# Altium PCB пульт.PcbDoc
Units mm, origin at the board's own origin, x right, y up, seen from the top; angles counter-clockwise.
Board outline 62 x 76 mm, 2 copper layers (Top Layer, Bottom Layer); 32 components, 66 nets, 214 pads, 33 vias.
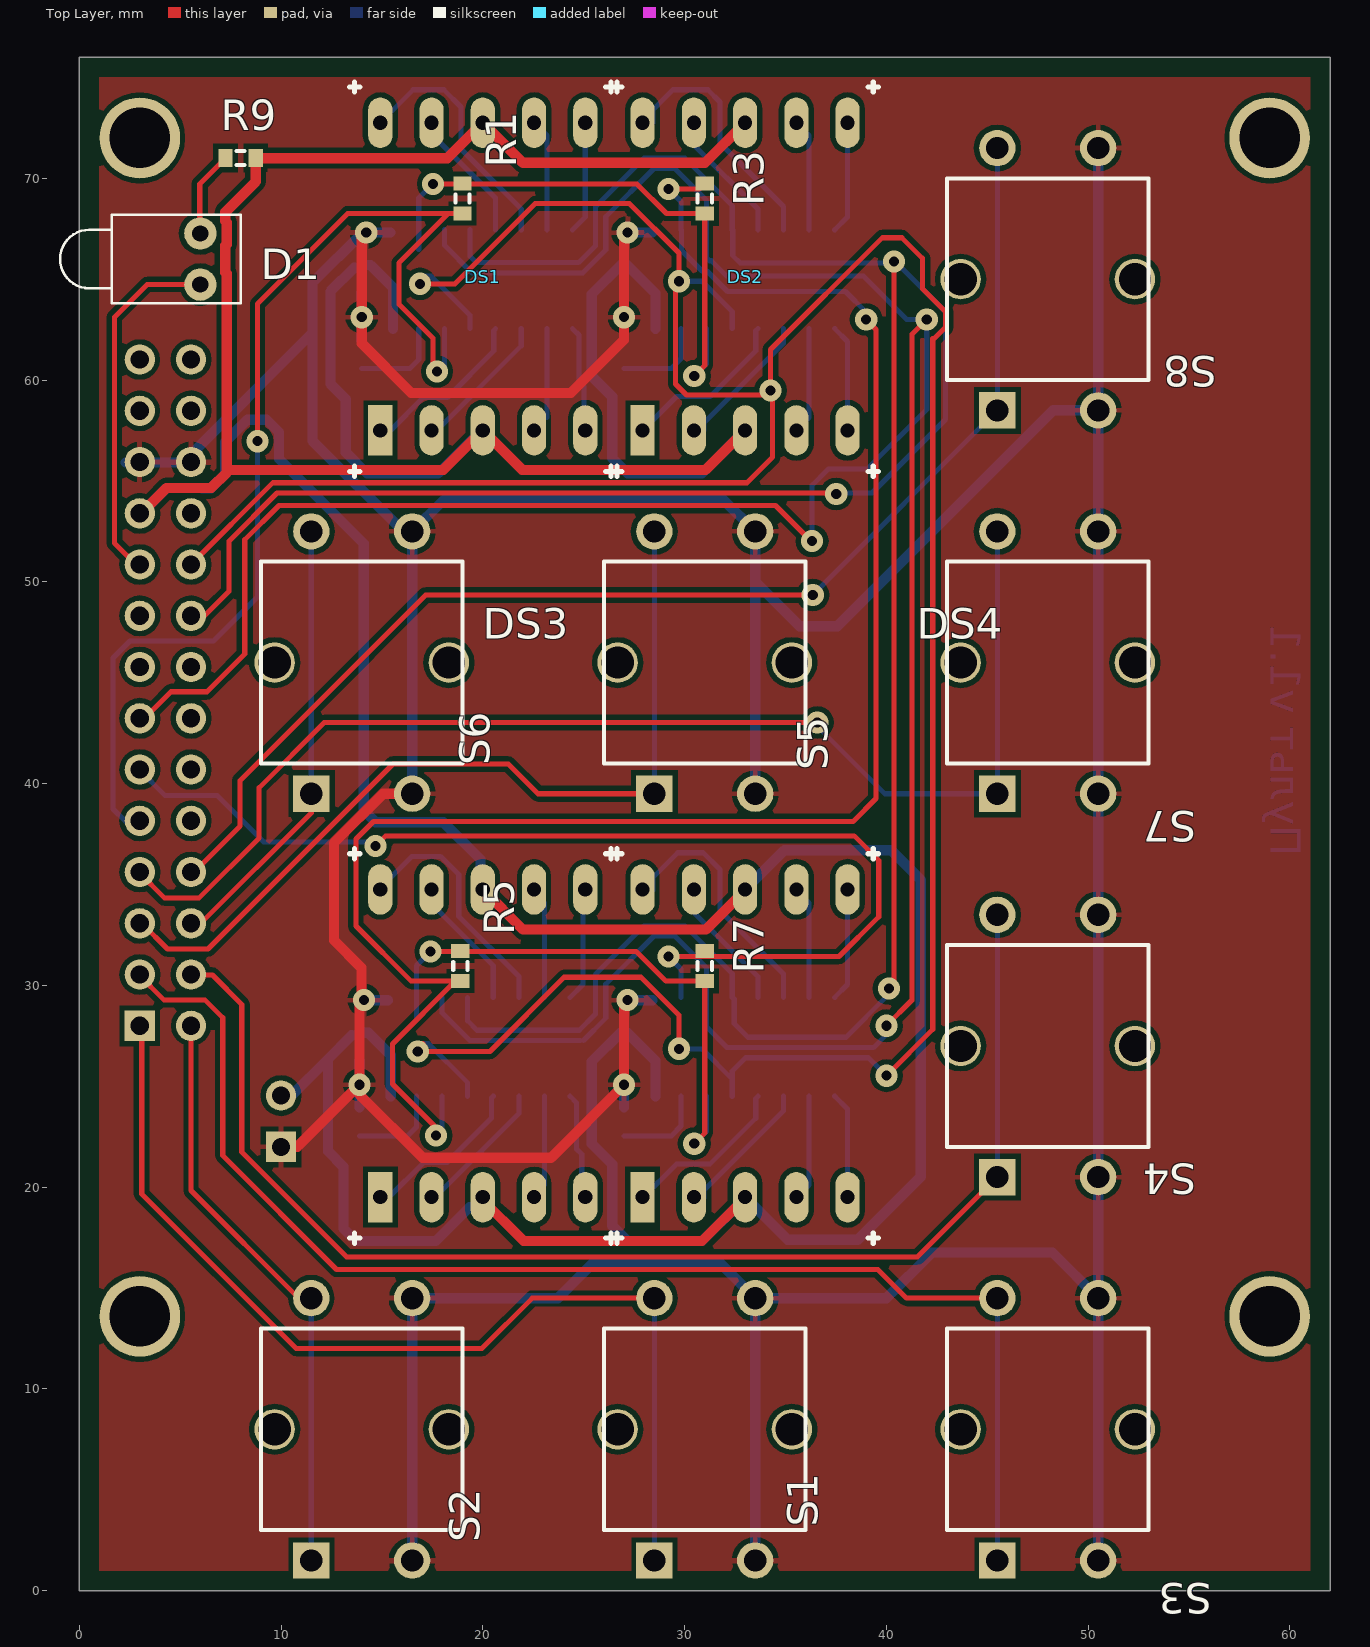
[diagram p0: Top Layer view]
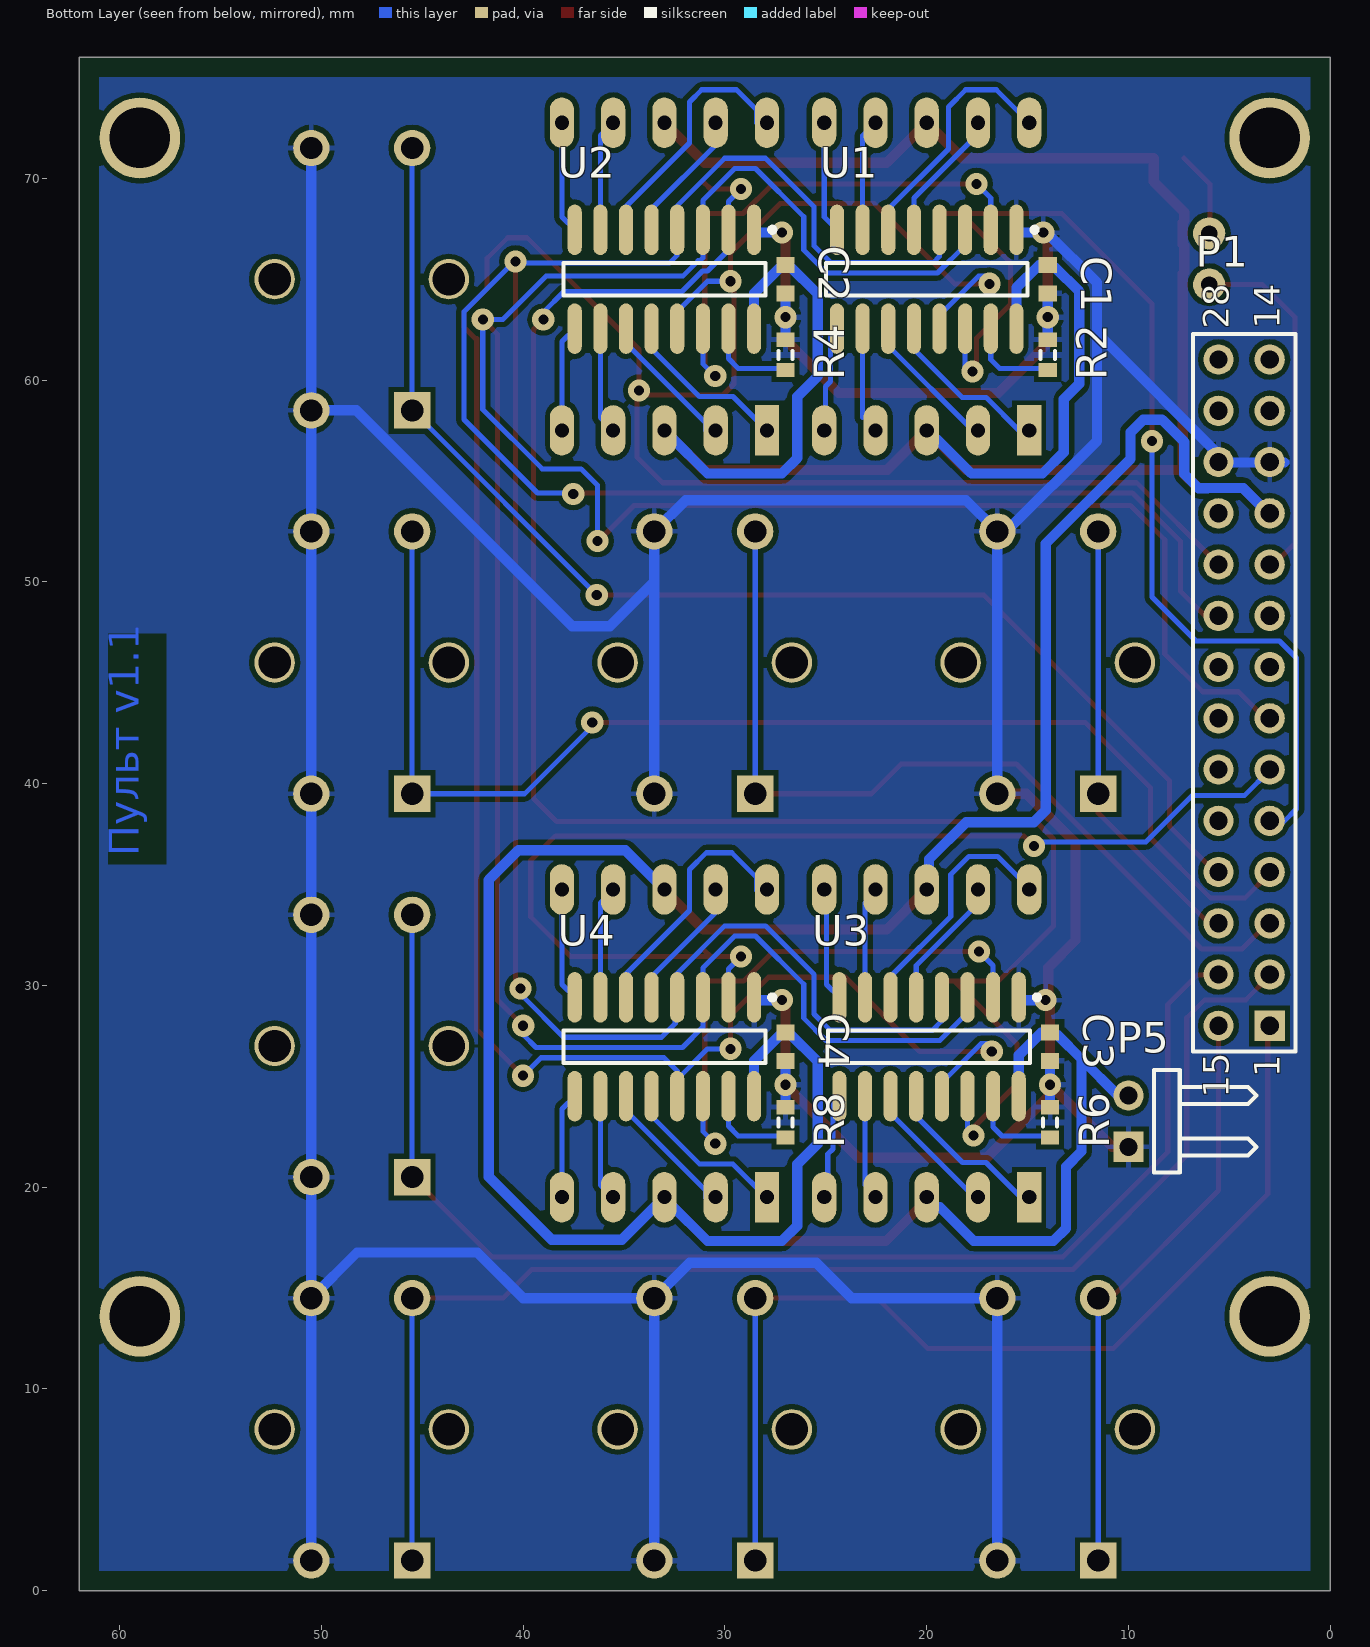
[diagram p1: Bottom Layer view, seen from below]

## Layer stack, top to bottom
Top Layer: signal copper 0.0356
Dielectric: dielectric 0.32, FR-4, Dk 4.8
Bottom Layer: signal copper 0.0356

## Board outline
0,0 62,0 62,76 0,76

## Design rules (kind name [scope] priority, off if disabled: settings)
Clearance [All] p1: gap=0.254
ComponentClearance [All] p1 off: gap=0.254 collisioncheckmode=3 verticalgap=0.254 showdistances=FALSE
PolygonConnect [All] p1: connectstyle=Relief reliefconductorwidth=0.254 reliefentries=4 polygonreliefangle="90 Angle"
RoomDefinition пульт [InComponentClass('пульт')] p1: confinementstyle=ConfineIn formatcopy=TRUE lockcomponents=FALSE outline -3.404,0 61.991,0 61.991,75.997 -3.404,75.997
RoomDefinition "U_Индикатор с драйвером4" [InComponentClass('U_Индикатор с драйвером4')] p2: confinementstyle=ConfineIn formatcopy=TRUE lockcomponents=FALSE outline 23.815,16 40.96,16 40.96,37.96 23.815,37.96
RoomDefinition "U_Индикатор с драйвером3" [InComponentClass('U_Индикатор с драйвером3')] p3: confinementstyle=ConfineIn formatcopy=TRUE lockcomponents=FALSE outline 11,16 27.885,16 27.885,37.96 11,37.96
RoomDefinition "U_Индикатор с драйвером2" [InComponentClass('U_Индикатор с драйвером2')] p4: confinementstyle=ConfineIn formatcopy=TRUE lockcomponents=FALSE outline 23.815,54.04 40.96,54.04 40.96,76 23.815,76
RoomDefinition "U_Индикатор с драйвером1" [InComponentClass('U_Индикатор с драйвером1')] p5: confinementstyle=ConfineIn formatcopy=TRUE lockcomponents=FALSE outline 11.115,54.04 28,54.04 28,76 11.115,76
RoutingVias [All] p1: holewidth=0.5 width=1.1 viastyle="Through Hole" minholewidth=0.5 minwidth=1.1 maxholewidth=0.5 maxwidth=1.1
SilkscreenOverComponentPads [All] p1: minsilkscreentomaskgap=0.254
SolderMaskExpansion [All] p1: expansion=0.102
Width Width_1 [(InNet('5V') OR InNet('GND'))] p1: maxlimit=0.508 minlimit=0.508 preferedwidth=0.508
Width [All] p2: maxlimit=0.254 minlimit=0.254 preferedwidth=0.254
26 further rules are at their usual default settings.

## Classes and differential pairs
component class "U_Индикатор с драйвером1": C1 DS1 R1 R2 U1
component class "U_Индикатор с драйвером2": C2 DS2 R3 R4 U2
component class "U_Индикатор с драйвером3": C3 DS3 R5 R6 U3
component class "U_Индикатор с драйвером4": C4 DS4 R7 R8 U4
component class пульт: D1 P1 P5 R9 S1 S2 S3 S4 S5 S6 S7 S8
channel class "Индикатор с драйвером": "U_Индикатор с драйвером1" "U_Индикатор с драйвером2" "U_Индикатор с драйвером3" "U_Индикатор с драйвером4"

## Components (designator, comment, footprint, x,y, rotation, side; value= is the part's Value field where it differs from the comment)
C1 "Cap Semi" CAPC1608L 14,65 r90 bottom
C2 "Cap Semi" CAPC1608L 27,65 r90 bottom (schematic designator C1)
C3 "Cap Semi" CAPC1608L 13.885,26.96 r90 bottom (schematic designator C1)
C4 "Cap Semi" CAPC1608L 27,26.96 r90 bottom (schematic designator C1)
D1 "LED1" LED-1 6,66 r180 top
DS1 "SA52" LED52 20,65 r90 top locked
DS2 "SA52" LED52 33,65 r90 top locked (schematic designator DS1)
DS3 "SA52" LED52 20,27 r90 top locked (schematic designator DS1)
DS4 "SA52" LED52 33,27 r90 top locked (schematic designator DS1)
P1 "Header 14X2A" HDR2X14_CEN 3,28 r90 bottom
P5 "POWER" HDR1X2H 10,22 r90 bottom
R1 "0" RESC1608L 19,69 r270 top
R2 "Res3" RESC1608L 14,61.25 r270 bottom
R3 "0" RESC1608L 31,69 r270 top (schematic designator R1)
R4 "Res3" RESC1608L 27,61.25 r270 bottom (schematic designator R2)
R5 "0" RESC1608L 18.885,30.96 r270 top (schematic designator R1)
R6 "Res3" RESC1608L 13.885,23.21 r270 bottom (schematic designator R2)
R7 "0" RESC1608L 31,30.96 r270 top (schematic designator R1)
R8 "Res3" RESC1608L 27,23.21 r270 bottom (schematic designator R2)
R9 "Res3" RESC1608L 8,71 r180 top
S1 "SWT-9" SWT-9 31,8 r90 top locked
S2 "SWT-9" SWT-9 14,8 r90 top locked
S3 "SWT-9" SWT-9 48,8 r90 top locked
S4 "SWT-9" SWT-9 48,27 r90 top locked
S5 "SWT-9" SWT-9 31,46 r90 top locked
S6 "SWT-9" SWT-9 14,46 r90 top locked
S7 "SWT-9" SWT-9 48,46 r90 top locked
S8 "SWT-9" SWT-9 48,65 r90 top locked
U1 "MBI5168" SO-16_M 20,65 r270 bottom
U2 "MBI5168" SO-16_M 33,65 r270 bottom (schematic designator U1)
U3 "MBI5168" SO-16_M 19.885,26.96 r270 bottom (schematic designator U1)
U4 "MBI5168" SO-16_M 33,26.96 r270 bottom (schematic designator U1)

## Footprints (in the part's own frame and the unit in brackets; to place one, negate y for a bottom-side part, rotate by r counter-clockwise, add the part's x,y. Pads: shape width x height; smd on the part's side, far side on the other; paste and mask are expansions set on the pad)
CAPC1608L [mm] "Chip Capacitor, Body 1.6x0.8mm, IPC High Density"
  rect 0.8x0.9 smd: 1(-0.7,0) 2(0.7,0)
  body extent -0.87,-0.48 0.87,0.48, height 1.3
HDR1X2H [mm] "Connector; Header; 2 Position; Right Angle"
  rect 1.5x1.5 hole 0.9: 1(0,0)
  round 1.5 hole 0.9: 2(2.54,0)
  silkscreen extent -1.27,-6.35 3.81,-1.27
HDR2X14_CEN [mm] "Connector; Header; 14x2 Position"
  rect 1.5x1.5 hole 0.9: 1(0,0)
  round 1.5 hole 0.9: 2(2.54,0) 3(5.08,0) 4(7.62,0) 5(10.16,0) 6(12.7,0) 7(15.24,0) 8(17.78,0) 9(20.32,0) 10(22.86,0) 11(25.4,0) 12(27.94,0) 13(30.48,0) 14(33.02,0) 15(0,2.54) 16(2.54,2.54) 17(5.08,2.54) 18(7.62,2.54) 19(10.16,2.54) 20(12.7,2.54) 21(15.24,2.54) 22(17.78,2.54) 23(20.32,2.54) 24(22.86,2.54) 25(25.4,2.54) 26(27.94,2.54) 27(30.48,2.54) 28(33.02,2.54)
  silkscreen extent -1.27,-1.27 34.29,3.81
LED52 [mm]
  rect 2.5x1.2 hole 0.7: 1(-7.493,5.08)
  oval 2.5x1.2 hole 0.7: 2(-7.493,2.54) 3(-7.493,0) 4(-7.493,-2.54) 5(-7.493,-5.08) 6(7.757,-5.08) 7(7.757,-2.54) 8(7.757,0) 9(7.757,2.54) 10(7.757,5.08)
  silkscreen extent -9.78,-6.6 9.78,6.6, body extent -9.53,-6.35 9.53,6.35, height 8
LED-1 [mm] "Typical RED GaAs LED; 2 Leads"
  round 1.6 hole 0.8: 1(0,1.27) 2(0,-1.27)
  silkscreen extent -2,-2.2 6.95,2.2
RESC1608L [mm] "Chip Resistor, Body 1.6x0.8mm, IPC High Density"
  rect 0.7x0.9 smd: 1(-0.75,0) 2(0.75,0)
  silkscreen extent -0.2,-0.35 0.2,0.35, body extent -0.85,-0.48 0.85,0.48, height 0.9
SO-16_M [mm] "16-Pin Small Outline Integrated Circuit 1.27 mm Pitch, IPC Low Density"
  oval 2.5x0.7 smd: 1(-2.45,4.445) 2(-2.45,3.175) 3(-2.45,1.905) 4(-2.45,0.635) 5(-2.45,-0.635) 6(-2.45,-1.905) 7(-2.45,-3.175) 8(-2.45,-4.445) 9(2.45,-4.445) 10(2.45,-3.175) 11(2.45,-1.905) 12(2.45,-0.635) 13(2.45,0.635) 14(2.45,1.905) 15(2.45,3.175) 16(2.45,4.445)
  silkscreen extent -2.57,-5 0.8,5.47, body extent -2,-5 2,5, height 1.75
SWT-9 [mm]
  rect 1.8x1.8 hole 1.1: 1(-6.5,2.5)
  round 1.8 hole 1.1: 2(6.5,2.5) 3(6.5,-2.5) 4(-6.5,-2.5)
  round 2 hole 1.6: 4(0,4.318) 5(0,-4.318)
  silkscreen extent -5,-5 5,5

## Part data
C1 C2 C3 C4: "Capacitor (Semiconductor SIM Model)"
D1: "Typical RED GaAs LED"
DS1 DS2 DS3 DS4: library part SA52-11, "KingBright, SA23-11"
P1: "Header, 14-Pin, Dual row"
P5: library part "Header 2H", "Header, 2-Pin, Right Angle"
R1 R3 R5 R7: library part Res3, "Resistor"
R2 R4 R6 R8 R9: "Resistor"
S1 S2 S3 S4 S5 S6 S7 S8: "Switch"
U1 U2 U3 U4: "Macroblock, 8-bit Constant Current LED Sink Driver"

## Free pads (board coordinates)
  round 4 hole 3: 0(3,13.6) 1(59,13.6) 2(59,72) 3(3,72)

## Via types
v1: diameter 1.1, hole 0.5, Top Layer to Bottom Layer, 33 vias

## Nets (pads, with @x,y where several pads share a name; then routed paths per layer and width w, separated by ;. In a path a pad name is that pad's centre, name@x,y a point inside that pad or via, vN(x,y) a via of type N, cw(c..) or ccw(c..) an arc to the next point about the centre after c; other vN are vias at no path point)
5V: C1.2 C2.2 C3.2 C4.2 DS1.3 DS1.8 DS2.3 DS2.8 DS3.3 DS3.8 DS4.3 DS4.8 P1.11 P5.2 R9.1 U1.16 U2.16 U3.16 U4.16 | length 273.1
  Top Layer w0.508: P1.11@3.055,53.372 4.341,54.658 6.55,54.658 7.308,55.416 7.308,65.272 7.239,65.341 7.239,66.659 7.308,66.728 7.308,67.812 7.239,67.881 7.239,68.326 8.75,69.837 R9.1 ; 7.442,55.55 18.043,55.55 DS1.3 21.957,55.55 31.043,55.55 DS2.3 ; 10.523,71 R9.1 ; DS3.3@19.885,19.467 22.02,17.332 30.865,17.332 DS4.3@33,19.467 ; DS3.8 21.991,32.766 31.049,32.766 DS4.8@33,34.717 ; DS2.8 31.012,70.769 21.988,70.769 DS1.8 18.242,70.999 R9.1 R9.1
  Bottom Layer w0.508: P1.11@3.055,53.372 4.341,54.658 ; 4.318,54.658 6.038,54.658 ; 6.061,54.658 6.084,54.635 6.528,54.635 7.239,55.347 7.239,56.936 8.333,58.03 9.277,58.03 9.897,57.41 9.897,56.103 14.097,51.903 14.097,38.684 14.689,38.092 18.042,38.092 19.885,36.249 DS3.8@19.885,34.717 ; P5.2 10.516,24.54 12.331,26.355 ; C3.2@13.509,27.533 12.331,26.355 ; C1.2@13.624,65.573 12.446,64.395 12.446,59.817 13.208,59.055 13.208,56.424 14.26,55.372 17.784,55.372 DS1.3@19.469,57.057 ; C3.2 14.322,27.66 15.44,26.542 U3.16 ; C1.2 14.437,65.7 15.555,64.582 U1.16 ; 19.354,19.017 17.669,17.332 13.728,17.332 13.093,17.967 13.093,21.015 12.331,21.777 12.331,26.355 ; U4.16 28.555,26.273 27.168,27.66 C4.2 26.832,27.66 25.4,26.228 25.4,22.158 26.416,21.142 26.416,18.094 27.178,17.332 30.865,17.332 32.677,19.144 32.677,19.467 DS4.3@33,19.467 ; U2.16 28.555,64.313 27.168,65.7 C2.2 26.832,65.7 25.4,64.268 25.4,60.198 26.416,59.182 26.416,56.134 27.178,55.372 30.865,55.372 32.677,57.184 32.677,57.507 DS2.3 ; DS4.3 35.108,17.399 38.583,17.399 41.707,20.523 41.707,35.23 40.234,36.703 34.946,36.703 DS4.8
+3.3V: P1.13
+BATT: P1.25
\O\E: P1.24 U1.13 U2.13 U3.13 U4.13 | length 158.8
  Top Layer w0.254: P1.24 9.595,54.915 33.096,54.915 34.366,56.185 v1@34.366,59.487 ; v1(16.891,64.77) 18.618,64.77 22.597,68.749 27.263,68.749 29.718,66.294 v1(29.718,64.897) 29.549,64.728 29.549,59.812 30.094,59.267 v1@34.265,59.267 ; v1@17.03,27.111 16.776,26.857 v1(16.776,26.73) 20.355,26.73 24.028,30.404 27.838,30.404 29.718,28.524 v1(29.718,26.857) ; v1(34.265,59.487) 34.265,61.519 39.802,67.056 40.767,67.056 41.783,66.04 41.783,64.516 ; v1(40.005,25.527) 42.301,27.823 42.301,62.069 42.386,62.069 42.931,62.614 42.931,63.386 41.801,64.516
  Bottom Layer w0.254: v1(16.776,26.73) 16.776,26.857 17.03,27.111 17.313,27.111 19.25,25.174 U3.13 ; v1@17.145,65.151 17.428,65.151 19.365,63.214 U1.13 ; v1(29.718,26.857) 30.861,26.857 32.365,25.353 U4.13 32.365,25.761 33.02,26.416 39.116,26.416 v1(40.005,25.527) ; v1(29.718,64.897) 30.861,64.897 32.365,63.393 U2.13
CLK: P1.7 U1.3 U2.3 U3.3 U4.3 | length 156.2
  Top Layer w0.254: P1.7@3.207,43.212 4.547,44.552 6.325,44.552 8.204,46.431 8.204,52.087 9.898,53.781 34.509,53.781 v1@36.46,51.831 ; v1(40,28) 41.25,29.25 ; 41.275,29.25 41.275,62.275 v1(42,63)
  Bottom Layer w0.254: U3.3 17.98,28.647 19.356,27.271 24.843,27.271 ; U1.3 18.095,66.687 19.471,65.311 24.958,65.311 26.096,66.449 26.096,68.096 28.485,70.485 29.515,70.485 31.095,68.905 U2.3 31.095,66.06 31.242,65.913 31.325,65.913 32.087,65.151 38.862,65.151 41.013,63 v1(42,63) 42,58.543 39.058,55.601 37.135,55.601 36.322,54.788 v1(36.322,52.019) ; 24.989,27.271 26.096,28.378 26.096,30.056 28.485,32.445 29.515,32.445 31.095,30.865 U4.3 31.095,27.935 32.106,26.924 39.37,26.924 40,27.554 v1(40,28)
GND: C1.1 C2.1 C3.1 C4.1 P1.12 P1.26 P5.1 R2.1 R4.1 R6.1 R8.1 S1.3 S1.4@33.5,1.5 S2.3 S2.4@16.5,1.5 S3.3 S3.4@50.5,1.5 S4.3 S4.4@50.5,20.5 S5.3 S5.4@33.5,39.5 S6.3 S6.4@16.5,39.5 S7.3 S7.4@50.5,39.5 S8.3 S8.4@50.5,58.5 U1.1 U2.1 U3.1 U4.1 | length 319.1
  Top Layer w0.508: P5.1 10.806,22 v1(13.885,25.079) ; v1(14.109,29.27) v1@13.982,29.27 ; v1(14.224,67.31) 14.097,67.31 14,67.213 v1(14,63.119) 14,61.819 16.459,59.36 24.36,59.36 27,62 27,67.386 27.076,67.31 v1(27.178,67.31) ; S6.4@16.5,39.5 15.06,39.5 12.624,37.063 12.624,32.237 13.982,30.879 v1@13.982,29.27 ; v1(27.178,29.27) 27.076,29.27 27,29.346 v1(27,25.079) 23.384,21.463 17.018,21.463 13.885,24.596 v1(13.885,25.079) ; v1(13.885,25.079) 13.885,29.173 v1@13.982,29.27
  Bottom Layer w0.508: P1.12@2.286,55.912 5.137,55.912 11.557,62.332 11.557,64.825 ; R6.1 C3.1 ; R2.1 C1.1 ; v1@14.042,67.31 11.557,64.825 ; v1(14.109,29.27) U3.1@15.3,29.27 ; v1(14.224,67.31) U1.1@15.415,67.31 ; S2.4@16.5,1.5 S2.3 23.72,14.5 25.476,16.256 31.744,16.256 S1.3 ; S6.4@16.5,39.5 S6.3 ; R8.1 C4.1 ; R4.1 C2.1 ; v1(27.178,29.27) U4.1@28.415,29.27 ; v1(27.178,67.31) U2.1@28.415,67.31 ; S1.4@33.5,1.5 S1.3 ; S5.4@33.5,39.5 S5.3 ; S3.4@50.5,1.5 S8.3 ; S3.3 48.236,16.764 42.266,16.764 40.002,14.5 S1.3 ; S8.4@50.5,58.5 48.264,58.5 37.567,47.803 35.712,47.803 33.5,50.015 S5.3 ; 11.557,64.825 11.557,56.998 16.055,52.5 S6.3 ; S6.3 18.051,54.051 31.949,54.051 S5.3
  other v1: 27,63.119
LE: P1.23 U1.4 U2.4 U3.4 U4.4 | length 148.3
  Top Layer w0.254: P1.23 6.207,48.32 7.417,49.53 7.417,52.018 9.805,54.407 36.982,54.407 v1@37.363,54.026 ; v1(40.132,29.845) 40.353,29.845 40.381,29.873 v1(40.381,65.873)
  Bottom Layer w0.254: U3.4 19.25,28.248 19.719,27.779 24.779,27.779 25.588,28.588 25.588,30.548 27.993,32.953 30.007,32.953 32.365,30.595 U4.4 32.461,29.314 32.461,28.118 33.147,27.432 37.998,27.432 40,29.434 40.381,29.873 40.353,29.845 v1(40.132,29.845) ; U1.4 19.365,66.135 19.681,65.819 24.748,65.819 25.588,66.659 25.588,68.588 27.993,70.993 30.007,70.993 32.365,68.635 U2.4 32.385,67.43 32.385,66.167 32.741,65.811 v1@40,65.811 ; v1(37.516,54.356) 37.516,53.975 37.948,54.407 39.294,54.407 42.931,58.044 42.931,63.386 40.444,65.873 v1(40.381,65.873)
LED: D1.1 P1.10 | length 17.4
  Top Layer w0.254: P1.10@2.905,50.765 1.753,51.918 1.753,63.119 3.364,64.73 D1.1@5.656,64.73
NetD1_2: D1.2 R9.2 | length 4.3
  Top Layer w0.254: D1.2@5.969,67.27 5.969,69.719 R9.2
NetDS1_1: DS1.1 U1.12 | length 7.9
  Bottom Layer w0.254: DS1.1@15.423,57.507 17.054,59.138 18.244,59.138 20.544,61.438 20.544,62.459 U1.12
NetDS1_2: DS1.2 U1.11 | length 7
  Bottom Layer w0.254: DS1.2@17.526,57.507 17.712,57.507 21.905,61.7 U1.11
NetDS1_4: DS1.4 U1.10 | length 4.4
  Bottom Layer w0.254: 23.175,58.142 U1.10
NetDS1_5: DS1.5 U1.9 | length 5.3
  Bottom Layer w0.254: U1.9 24.765,62.23 24.765,59.935 25.019,59.681 25.019,57.568 DS1.5
NetDS1_6: DS1.6 U1.8 | length 5.6
  Bottom Layer w0.254: U1.8 25.08,68.085 DS1.6
NetDS1_7: DS1.7 U1.7 | length 5.6
  Bottom Layer w0.254: DS1.7 23.175,72.122 U1.7
NetDS1_9: DS1.9 U1.5 | length 6.1
  Bottom Layer w0.254: DS1.9@17.46,72.202 19.841,69.821 20.635,69.027 U1.5
NetDS1_10: DS1.10 U1.6 | length 12.4
  Bottom Layer w0.254: DS1.10 16.551,74.388 18.068,74.388 18.923,73.533 18.923,71.457 21.905,68.475 U1.6
NetDS2_1: DS2.1 U2.12 | length 8.4
  Bottom Layer w0.254: DS2.1 29.595,59.182 31.267,59.182 33.528,61.443 33.528,62.443 U2.12
NetDS2_2: DS2.2 U2.11 | length 7.2
  Bottom Layer w0.254: DS2.2 30.963,57.507 30.963,57.887 34.905,61.829 U2.11
NetDS2_4: DS2.4 U2.10 | length 5.3
  Bottom Layer w0.254: DS2.4 36.175,58.142 U2.10
NetDS2_5: DS2.5 U2.9 | length 5.3
  Bottom Layer w0.254: U2.9 38.08,61.915 DS2.5
NetDS2_6: DS2.6 U2.8 | length 5.6
  Bottom Layer w0.254: U2.8 38.08,68.085 DS2.6
NetDS2_7: DS2.7 U2.7 | length 5.6
  Bottom Layer w0.254: DS2.7 36.175,72.122 U2.7
NetDS2_9: DS2.9 U2.5 | length 6.6
  Bottom Layer w0.254: DS2.9 30.46,71.648 33.635,68.473 U2.5
NetDS2_10: DS2.10 U2.6 | length 12.8
  Bottom Layer w0.254: DS2.10 28.423,72.757 28.423,73.381 29.43,74.388 31.149,74.388 31.75,73.787 31.75,71.755 34.905,68.6 U2.6
NetDS3_1: DS3.1 U3.12 | length 7.9
  Bottom Layer w0.254: DS3.1@15.308,19.467 17.068,21.227 18.23,21.227 20.429,23.426 20.429,24.419 U3.12
NetDS3_2: DS3.2 U3.11 | length 7
  Bottom Layer w0.254: DS3.2@17.411,19.467 17.597,19.467 21.79,23.66 U3.11
NetDS3_4: DS3.4 U3.10 | length 4.4
  Bottom Layer w0.254: DS3.4@23.06,20.102 U3.10
NetDS3_5: DS3.5 U3.9 | length 5.3
  Bottom Layer w0.254: U3.9 24.65,24.19 24.65,21.895 24.904,21.641 24.904,19.528 DS3.5@24.965,19.467
NetDS3_6: DS3.6 U3.8 | length 5.6
  Bottom Layer w0.254: U3.8 24.965,30.045 DS3.6@24.965,34.717
NetDS3_7: DS3.7 U3.7 | length 5.6
  Bottom Layer w0.254: DS3.7@22.425,34.717 23.06,34.082 U3.7
NetDS3_9: DS3.9 U3.5 | length 6.1
  Bottom Layer w0.254: DS3.9@17.345,34.162 19.726,31.781 20.52,30.987 U3.5
NetDS3_10: DS3.10 U3.6 | length 12.4
  Bottom Layer w0.254: DS3.10@14.805,34.717 16.486,36.398 17.903,36.398 18.808,35.493 18.808,33.417 21.79,30.435 U3.6
NetDS4_1: DS4.1 U4.12 | length 8.4
  Bottom Layer w0.254: DS4.1@27.92,19.467 29.595,21.142 31.251,21.142 33.528,23.419 33.528,24.403 U4.12
NetDS4_2: DS4.2 U4.11 | length 7.2
  Bottom Layer w0.254: DS4.2@30.46,19.467 30.963,19.467 30.963,19.847 34.905,23.789 U4.11
NetDS4_4: DS4.4 U4.10 | length 5.3
  Bottom Layer w0.254: DS4.4@35.54,19.467 36.175,20.102 U4.10
NetDS4_5: DS4.5 U4.9 | length 5.3
  Bottom Layer w0.254: U4.9 38.08,23.875 DS4.5@38.08,19.467
NetDS4_6: DS4.6 U4.8 | length 5.6
  Bottom Layer w0.254: U4.8 38.08,30.045 DS4.6@38.08,34.717
NetDS4_7: DS4.7 U4.7 | length 5.6
  Bottom Layer w0.254: DS4.7@35.54,34.717 36.175,34.082 U4.7
NetDS4_9: DS4.9 U4.5 | length 6.6
  Bottom Layer w0.254: DS4.9@30.46,34.717 30.46,33.608 33.635,30.433 U4.5
NetDS4_10: DS4.10 U4.6 | length 13
  Bottom Layer w0.254: DS4.10@27.92,34.717 28.423,34.717 28.423,35.341 29.658,36.576 30.921,36.576 31.75,35.747 31.75,33.715 34.905,30.56 U4.6
NetR1_1: R1.1 R3.2 U1.2 U2.14 | length 28.5
  Top Layer w0.254: v1(17.526,69.723) 27.635,69.723 29.108,68.25 R3.2 31,60.718 v1(30.48,60.198)
  Bottom Layer w0.254: U1.2@16.825,66.487 U1.2 16.825,69.022 v1(17.526,69.723) ; v1(30.48,60.198) 31.095,60.813 U2.14
NetR2_2: R2.2 U1.15 | length 4.5
  Bottom Layer w0.254: R2.2@14,60.579 16.383,60.579 16.825,61.021 U1.15
NetR3_1: R3.1 R5.2 U2.2 U3.14 | length 89.7
  Top Layer w0.254: v1@17.678,22.425 17.678,22.958 15.519,25.117 15.519,27.102 18.628,30.21 R5.2 16.45,30.21 13.716,32.944 13.716,37.258 14.584,38.125 38.354,38.125 39.492,39.263 39.492,62.508 v1(39,63) ; v1(29.21,69.469) 30.719,69.469 R3.1
  Bottom Layer w0.254: v1@17.674,22.167 17.98,22.473 U3.14 ; v1@29.337,69.342 29.825,68.854 U2.2 29.845,67.43 29.845,66.421 30.861,65.405 31.115,65.405 32.131,64.389 37.973,64.389 39,63.362 v1(39,63)
  other v1: 17.678,22.555
NetR4_2: R4.2 U2.15 | length 4.5
  Bottom Layer w0.254: R4.2@27,60.579 29.337,60.579 29.825,61.067 U2.15
NetR5_1: R5.1 R7.2 U3.2 U4.14 | length 28.6
  Top Layer w0.254: v1(17.411,31.683) 27.601,31.683 29.074,30.21 R7.2 31,22.678 v1(30.48,22.158)
  Bottom Layer w0.254: U3.2@16.71,28.447 U3.2 16.71,30.982 v1(17.411,31.683) ; v1(30.48,22.158) 31.095,22.773 U4.14
NetR6_2: R6.2 U3.15 | length 4.5
  Bottom Layer w0.254: R6.2@13.885,22.539 16.268,22.539 16.71,22.981 U3.15
NetR8_2: R8.2 U4.15 | length 4.5
  Bottom Layer w0.254: R8.2@27,22.539 29.337,22.539 29.825,23.027 U4.15
PA0: P1.1 S1.1 S1.2 | length 50.9
  Top Layer w0.254: P1.1@3.099,28 3.099,19.66 10.744,12.014 19.964,12.014 22.45,14.5 S1.2
  Bottom Layer w0.254: S1.1 S1.2
PA1: P1.15 S2.1 S2.2 | length 29.3
  Top Layer w0.254: P1.15@5.537,28 5.537,19.837 10.875,14.5 S2.2
  Bottom Layer w0.254: S2.1 S2.2
PA2: P1.2 S3.1 S3.2 | length 66.2
  Top Layer w0.254: P1.2@2.965,30.512 4.191,29.286 6.223,29.286 7.112,28.397 7.112,21.565 12.751,15.926 39.573,15.926 40.999,14.5 S3.2
  Bottom Layer w0.254: S3.1 S3.2
PA3: P1.16 S4.1 S4.2 | length 64.7
  Top Layer w0.254: P1.16@5.54,30.512 6.597,30.512 8.052,29.058 8.052,21.742 13.259,16.535 41.535,16.535 S4.1
  Bottom Layer w0.254: S4.1 S4.2
PA4: P1.3 S5.1 S5.2 | length 43.3
  Top Layer w0.254: P1.3@3.118,33.052 4.369,31.801 6.375,31.801 15.545,40.97 21.26,40.97 22.73,39.5 S5.1
  Bottom Layer w0.254: S5.1 S5.2
PA5: P1.17 S6.1 S6.2 | length 21.7
  Top Layer w0.254: P1.17@6.001,33.052 11.5,38.551 S6.1
  Bottom Layer w0.254: S6.1 S6.2
PA6: P1.4 S7.1 S7.2 | length 62.9
  Top Layer w0.254: P1.4@2.965,35.592 4.216,34.341 5.944,34.341 8.915,37.313 8.915,39.802 12.141,43.028 v1(36.576,43.028)
  Bottom Layer w0.254: v1@36.754,43.307 36.754,42.672 39.926,39.5 S7.1 S7.2
PA7: P1.18 S8.1 S8.2 | length 63.6
  Top Layer w0.254: P1.18@5.671,35.592 7.976,37.897 7.976,40.157 17.17,49.352 v1(36.352,49.352)
  Bottom Layer w0.254: v1(36.352,49.352) S8.1 S8.2
PB1: P1.8
PC6: P1.9
PD4: P1.21
PD5: P1.22
RX1: P1.19
SCL: P1.14
SDA: P1.28
SDI: P1.6 R7.1 U4.2 | length 56.8
  Top Layer w0.254: v1(14.681,36.906) 15.189,37.414 38.405,37.414 39.624,36.195 39.624,33.406 37.647,31.429 v1(29.21,31.429) 30.719,31.429 R7.1
  Bottom Layer w0.254: P1.6@2.991,40.672 4.242,39.421 6.833,39.421 9.144,37.109 v1@14.681,37.109 ; v1@29.337,31.302 29.825,30.814 U4.2
SDO: P1.5 R1.2 U1.14 | length 56.6
  Top Layer w0.254: v1(8.839,56.972) 8.839,63.779 13.31,68.25 R1.2 18.288,68.25 15.85,65.811 15.85,63.754 17.526,62.078 17.526,60.198 17.729,60.401 v1(17.729,60.427)
  Bottom Layer w0.254: P1.5@2.286,38.132 1.676,38.742 1.676,46.228 2.515,47.066 6.655,47.066 8.839,49.251 v1(8.839,56.972) ; v1@17.789,60.207 18.095,60.513 U1.14
TX1: P1.20
pads on no net: P1.27 S1.4@26.682,8 S1.5 S2.4@9.682,8 S2.5 S3.4@43.682,8 S3.5 S4.4@43.682,27 S4.5 S5.4@26.682,46 S5.5 S6.4@9.682,46 S6.5 S7.4@43.682,46 S7.5 S8.4@43.682,65 S8.5

## Polygon pours and split planes (outlines as drawn)
GND on Bottom Layer "Bottom Layer-No Net" (solid): 61,75 1,75 1,1 61,1
GND on Top Layer "Bottom Layer-No Net" (solid): 61,75 1,75 1,1 61,1

## Other copper
Bottom Layer:
  text "Пульт v1.1" at 58.547,36.398 h2.54 r270

## Text inside footprints (layer, text, board x,y; h text height)
P1: Bottom Overlay "15" at 5.032,24.444 h1.27 r270; Bottom Overlay "1" at 2.492,25.46 h1.27 r270; Bottom Overlay "14" at 2.492,62.544 h1.27 r270; Bottom Overlay "28" at 5.032,62.544 h1.27 r270